# Altium PCB Audio_Amplifier PCB.PcbDoc
Units mm, origin at the board's own origin, x right, y up, seen from the top; angles counter-clockwise.
Board outline 83.5 x 52 mm, 2 copper layers (Top Layer, Bottom Layer); 42 components, 32 nets, 113 pads, 0 vias.
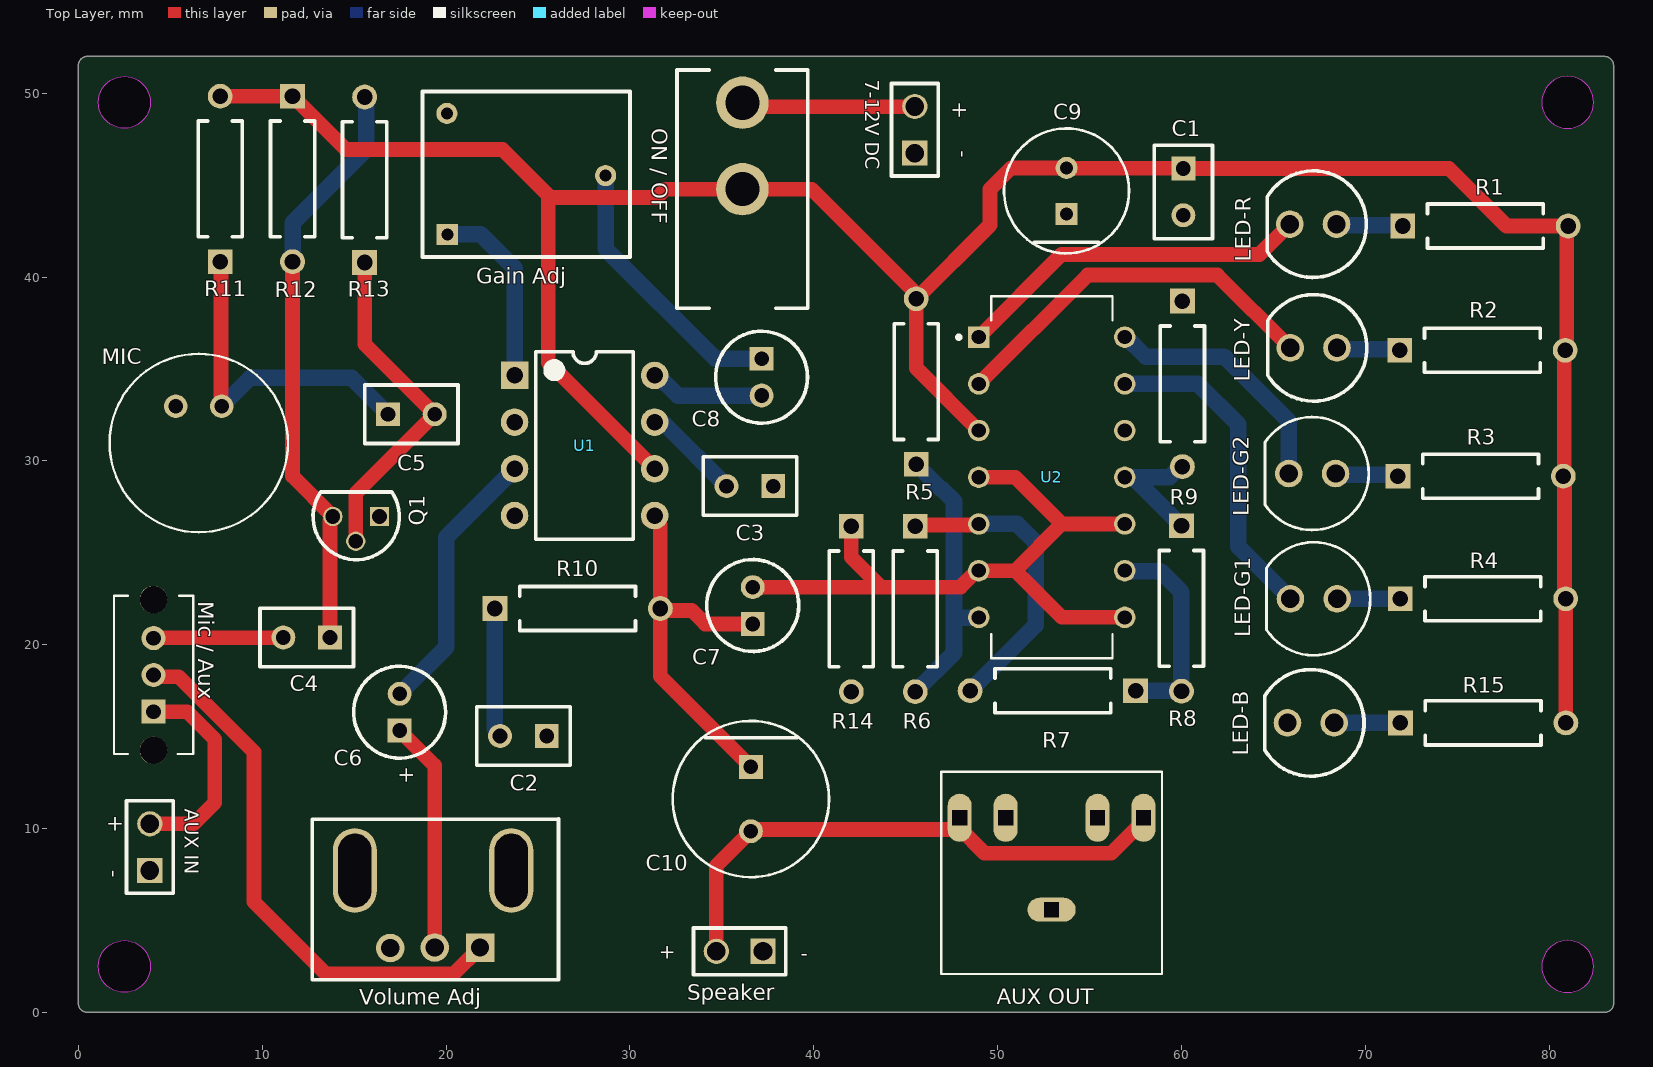
[diagram p0: Top Layer view]
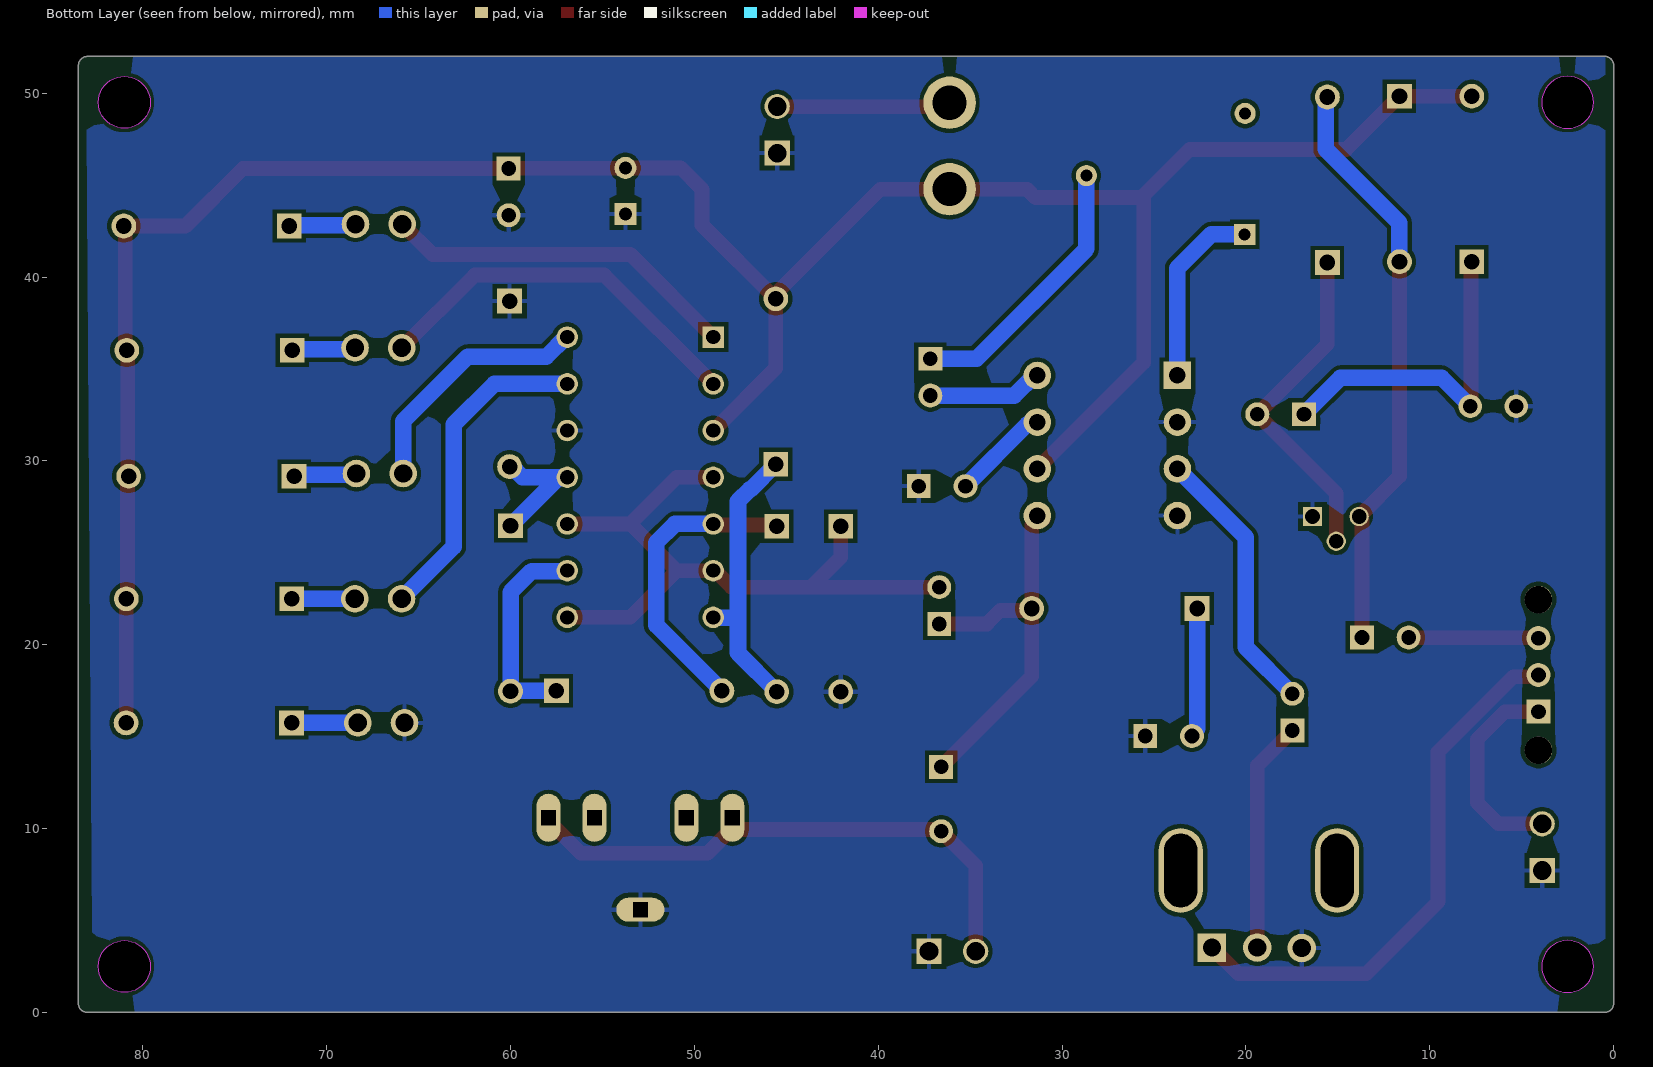
[diagram p1: Bottom Layer view, seen from below]

## Layer stack, top to bottom
Top Solder: solder mask 0.0102, Solder Resist, Dk 3.5
Top Layer: signal copper 0.0356
Dielectric 1: dielectric 0.32, FR-4, Dk 4.8
Bottom Layer: signal copper 0.0356
Bottom Solder: solder mask 0.0102, Solder Resist, Dk 3.5

## Board outline
0,0.5 0,51.5 cw(c0.5,51.5) 0.5,52 83,52 cw(c83,51.5) 83.5,51.5 83.5,0.5 cw(c83,0.5) 83,0 0.5,0 cw(c0.5,0.5)
cut-out: 2.5,1.086 cw(c2.5,2.5) 1.086,2.5 cw(c2.5,2.5) 2.5,3.914 cw(c2.5,2.5) 3.914,2.5 cw(c2.5,2.5)
cut-out: 79.586,49.5 ccw(c81,49.5) 81,48.086 ccw(c81,49.5) 82.414,49.5 ccw(c81,49.5) 81,50.914 ccw(c81,49.5)
cut-out: 79.586,2.5 ccw(c81,2.5) 81,1.086 ccw(c81,2.5) 82.414,2.5 ccw(c81,2.5) 81,3.914 ccw(c81,2.5)
cut-out: 2.5,48.086 cw(c2.5,49.5) 1.086,49.5 cw(c2.5,49.5) 2.5,50.914 cw(c2.5,49.5) 3.914,49.5 cw(c2.5,49.5)

## Design rules (kind name [scope] priority, off if disabled: settings)
Clearance [All] p1: gap=0.22 ignorepadtopadclearanceinfootprint=FALSE except(0.1: Text-Text; 0.254: Text-Hole)
HoleSize [All] p1: absolutevalues=TRUE maxlimit=5 minlimit=0.025 maxpercent=80.000 minpercent=20.000
MinimumSolderMaskSliver [All] p1: minsoldermaskwidth=0.12
PolygonConnect [All] p1: connectstyle=Relief reliefconductorwidth=0.254 reliefentries=4 polygonreliefangle="90 Angle" airgapwidth=0.254
RoutingVias [All] p1: holewidth=0.711 width=1.27 viastyle="Through Hole" minholewidth=0.711 minwidth=1.27 maxholewidth=0.711 maxwidth=1.27
SilkToSolderMaskClearance [IsPad] p1: minsilkscreentomaskgap=0.12 clearancetoexposedcopper=TRUE
SolderMaskExpansion [All] p1: expansion=0.05 istentingtop=FALSE
SupplyNets "Schematic Supply Nets" [InNet('GND')] p1: voltage=0.000
Width [All] p1: maxlimit=0.9 minlimit=0.8 preferedwidth=0.9 toplayer_maxwidth=0.8 toplayer_prefwidth=0.8 bottomlayer_minwidth=0.9 minimp=50.000000 maximp=50.000000 favimp=50.000000
27 further rules are at their usual default settings.

## Classes and differential pairs
component class Audio_Amplifier: "7-12V DC" "AUX IN" "AUX OUT" C1 C2 C3 C4 C6 C7 C8 C9 C10 LED-B LED-G1 LED-G2 LED-R LED-Y "Mic / Aux" Q1 R1 R2 R3 R4 R5 R6 R7 R8 R9 R10 R11 R13 R14 R15 Speaker

## Components (designator, comment, footprint, x,y, rotation, side; value= is the part's Value field where it differs from the comment)
"7-12V DC" "7-12V DC" SAMTEC_HTSW-101-08-T-D 45.491,48.006 r0 top (schematic designator J2)
"AUX IN" "Mic/Aux" SAMTEC_HTSW-101-08-T-D 3.886,8.992 r0 top (schematic designator J1)
"AUX OUT" "SJ1-3525NG" CUI_SJ1-3525NG 52.934,5.588 r90 top (schematic designator J4)
C1 "0.1uF" CAPR51-254-508X318X736 60.096,44.628 r270 top
C2 "0.1uF" CAPR51-254-508X318X736 24.206,15.037 r180 top
C3 "0.1uF" CAPR51-254-508X318X736 36.525,28.626 r180 top
C4 "0.1uF" CAPR51-254-508X318X736 12.421,20.396 r180 top
C5 "0.1uF" CAPR51-254-508X318X736 18.11,32.537 r0 top
C6 "1uF" CAPPR55-200-1100X500X1200 17.475,16.332 r90 top
C7 "1uF" CAPPR55-200-1100X500X1200 36.678,22.133 r90 top
C8 "10uF" CAPPR55-200-1100X500X1200 37.16,34.553 r270 top
C9 "100uF" FP-RAD-TH-D_6_3_0_5-L_11-MFG 53.746,44.684 r90 top
C10 "220uF" FP-EEU-FC1V221L-MFG 36.576,11.608 r270 top
"Gain Adj" "4.7k Trimmer" FP-3362U-MFG 24.689,44.704 r0 top
LED-B "LED-B" WL-TMRW_D5.8H11.7 67.031,15.748 r180 top
LED-G1 "151051VS04000" WL-TMRC_D5.9H8.7 67.192,22.498 r180 top
LED-G2 "151051VS04000" WL-TMRC_D5.9H8.7 67.107,29.312 r180 top
LED-R "151053RS03000" WL-TMRW_D5.8H11.7 67.158,42.875 r180 top
LED-Y "LED-Y" WL-TMRW_D5.8H11.7 67.183,36.144 r180 top
MIC "CMA-6542PF" CUI_CMA-6542PF 6.548,30.969 r270 top
"Mic / Aux" "Mic/Aux" SW_OS102011MS2QN1 4.089,18.358 r90 top (schematic designator S1)
"ON / OFF" "A101SYCB04" FP-A101SYCB04-MFG 36.119,44.78 r180 top (schematic designator SW2)
Q1 "2N3904" ONSC-TO-92-3-29-11 15.113,26.975 r180 top
R1 "MFR-25FBF52-10K" RESA60-630X240 76.53,42.774 r0 top value=470
R2 "MFR-25FBF52-10K" RESA60-630X240 76.366,36.012 r0 top value=470
R3 "MFR-25FBF52-10K" RESA60-630X240 76.265,29.166 r0 top value=470
R4 "MFR-25FBF52-10K" RESA60-630X240 76.392,22.498 r0 top value=470
R5 "MFR-25FBF52-10K" RESA60-630X240 45.568,34.315 r90 top value=80k
R6 "MFR-25FBF52-10K" RESA60-630X240 45.517,21.946 r270 top value=1.5k
R7 "MFR-25FBF52-10K" RESA60-630X240 53,17.5 r180 top value=1.5k
R8 "MFR-25FBF52-10K" RESA60-630X240 59.995,21.971 r270 top value=1.5k
R9 "MFR-25FBF52-10K" RESA60-630X240 60.046,34.188 r270 top value=1.5k
R10 "MFR-25FBF52-10K" RESA60-630X240 27.153,21.971 r0 top value=10K
R11 "MFR-25FBF52-10K" RESA60-630X240 7.712,45.332 r90 top value=47k
R12 "MFR-25FBF52-10K" RESA60-630X240 11.649,45.332 r270 top value=10k
R13 "MFR-25FBF52-10K" RESA60-630X240 15.57,45.288 r90 top value=100K
R14 "MFR-25FBF52-10K" RESA60-630X240 42.037,21.946 r270 top value=1M
R15 "MFR-25FBF52-10K" RESA60-630X240 76.403,15.748 r0 top value=680
R? "PTV09A-8025U-B103" FP-PTV09-8-MFG 19.406,-3.531 r0 top
Speaker "Speaker" SAMTEC_HTSW-101-08-T-D 35.966,3.327 r90 top (schematic designator J3)
U1 "LM386N-1" P0008A 27.534,30.836 r0 top
U2 "LM339N" DIP794W45P254L1969H508Q14 52.941,29.108 r0 top

## Footprints (in the part's own frame and the unit in brackets; to place one, negate y for a bottom-side part, rotate by r counter-clockwise, add the part's x,y. Pads: shape width x height; smd on the part's side, far side on the other; paste and mask are expansions set on the pad)
CAPPR55-200-1100X500X1200 [mm] "THD, 2-Leads, Dia 5mm, Body Length 11mm"
  rect 1.3x1.3 hole 0.8: 1(-1,0)
  round 1.3 hole 0.8: 2(1,0)
  silkscreen extent -2.5,-2.5 2.5,2.5, body extent -2.5,-2.5 2.5,2.5, height 12
CAPR51-254-508X318X736 [mm] "THD, 2-Leads, Body 5.08x3.18mm"
  rect 1.3x1.3 hole 0.8: 1(-1.27,0)
  round 1.3 hole 0.8: 2(1.27,0)
  silkscreen extent -2.54,-1.59 2.54,1.59, body extent -2.54,-1.59 2.54,1.59, height 7.36
CUI_CMA-6542PF [mm]
  round 1.278 hole 0.77: GND(-2,-1.25) OUT(-2,1.25)
  silkscreen extent -4.85,-4.85 4.85,4.85
CUI_SJ1-3525NG [mm]
  oval 1.308x2.616 hole 0.8 square: 1(0,0)
  oval 2.616x1.308 hole 0.8 square: 2(5,-5) 3(5,5) 4(5,-2.5) 5(5,2.5)
  silkscreen extent -3.5,-6 7.5,6
DIP794W45P254L1969H508Q14 [mm]
  rect 1.17x1.17 / inner round 1.17 / far side rect 1.17x1.17 hole 0.77: 1(-3.97,7.62)
  round 1.17 hole 0.77: 2(-3.97,5.08) 3(-3.97,2.54) 4(-3.97,0) 5(-3.97,-2.54) 6(-3.97,-5.08) 7(-3.97,-7.62) 8(3.97,-7.62) 9(3.97,-5.08) 10(3.97,-2.54) 11(3.97,0) 12(3.97,2.54) 13(3.97,5.08) 14(3.97,7.62)
  silkscreen extent -5.15,-9.84 3.3,9.84, body extent -4.25,-9.53 4.25,9.53, height 5.33
FP-3362U-MFG [mm]
  rect 1.15x1.15 hole 0.65 paste-2539.97 mask+0: 1(-4.623,-2.388)
  round 1.15 hole 0.65 paste-2539.97 mask+0: 2(3.988,0.813) 3(-4.648,4.191)
  silkscreen extent -5.97,-3.62 5.31,5.38
FP-A101SYCB04-MFG [mil]
  round 112.37 hole 73 paste-99999 mask+0: 2(0,0) 3(0,-185)
  silkscreen extent -140,-255 140,255, body extent -144,-259 144,259, height 10
FP-EEU-FC1V221L-MFG [mm]
  rect 1.3x1.3 hole 0.8 paste-2539.97 mask+0: 1(-1.75,0)
  round 1.3 hole 0.8 paste-2539.97 mask+0: 2(1.75,0)
  silkscreen extent -4.25,-4.25 4.25,4.25, body extent -4.35,-4.35 4.35,4.35, height 0.25
FP-PTV09-8-MFG [mm]
  rect 1.55x1.55 hole 1 paste-2539.97 mask+0: 1(2.438,7.061)
  round 1.55 hole 1 paste-2539.97 mask+0: 2(-2.438,7.036) 3(-0.025,7.061)
  rrect100% 2.4x4.6 hole 4 slot 1.8 at 0 deg paste-2539.97 mask+0: 4(-4.369,11.252) 5(4.14,11.252)
  silkscreen extent -6.68,5.31 6.71,14.05
FP-RAD-TH-D_6_3_0_5-L_11-MFG [mm]
  rect 1.2x1.2 hole 0.7 paste-2539.97 mask+0: 1(-1.25,0)
  round 1.2 hole 0.7 paste-2539.97 mask+0: 2(1.25,0)
  silkscreen extent -3.4,-3.4 3.4,3.4, body extent -3.5,-3.5 3.5,3.5, height 0.25
ONSC-TO-92-3-29-11 [mm] "TO, 3-Leads, Body Dia 4.7mm, Pitch 1.27mm"
  rect 1.05x1.05 hole 0.8: 1(-1.27,0)
  round 1.05 hole 0.8: 2(0.025,1.346) 3(1.27,0)
  silkscreen extent -2.35,-1.34 2.35,2.35, body extent -2.35,-1.33 2.36,2.36, height 7.87
P0008A [mm] "DIP, 8-Leads, Body 10.15x6.6mm, Pitch 2.54mm"
  rect 1.5x1.5 hole 0.9: 1(-3.81,3.81)
  round 1.5 hole 0.9: 2(-3.81,1.27) 3(-3.81,-1.27) 4(-3.81,-3.81) 5(3.81,-3.81) 6(3.81,-1.27) 7(3.81,1.27) 8(3.81,3.81)
  silkscreen extent -2.65,-5.1 2.65,5.1, body extent -3.95,-5.07 3.95,5.07, height 5.08
RESA60-630X240 [mm] "Axial Resistor, 2-Leads, Dia 2.4mm, Body Length 6.3mm"
  rect 1.35x1.35 hole 0.85: 1(-4.5,0)
  round 1.35 hole 0.85: 2(4.5,0)
  silkscreen extent -3.15,-1.2 3.15,1.2, body extent -4.77,-1.19 4.77,1.2, height 2.4
SAMTEC_HTSW-101-08-T-D [mm]
  rect 1.37x1.37 / inner round 1.37 / far side rect 1.37x1.37 hole 1.02: 01(0,-1.27)
  round 1.37 hole 1.02: 02(0,1.27)
  silkscreen extent -1.27,-2.51 1.27,2.51
SW_OS102011MS2QN1 [mm]
  rect 1.308x1.308 / inner round 1.308 / far side rect 1.308x1.308 hole 0.8: 1(-2,0)
  round 1.308 hole 0.8: 2(0,0) 3(2,0)
  round 1.5 hole 1.5 unplated: ""(-4.1,0) ""(4.1,0)
  silkscreen extent -4.3,-2.15 4.3,2.15, body extent -4.3,-2.15 4.3,2.15, height 4.4
WL-TMRC_D5.9H8.7 [mm] "THT Mono-color Round Color LED, 2-leads"
  round 1.5 hole 1: 1(-1.27,0) 2(1.27,0)
  silkscreen extent -3.07,-3.07 2.58,3.08, body extent -2.95,-2.95 2.45,2.95, height 9.2
WL-TMRW_D5.8H11.7 [mm] "THT Mono-color Round LED, 2-leads"
  round 1.5 hole 1: 1(1.27,0) 2(-1.27,0)
  silkscreen extent -2.9,-2.9 2.5,2.9, body extent -2.9,-2.9 2.5,2.9, height 11.7

## Part data
"7-12V DC" "AUX IN" Speaker: library part HTSW-101-08-T-D, Package=None, Availability=Unavailable, MP=HTSW-101-08-T-D, Price=None
"AUX OUT": library part CMP-002-00071-1, "3.5 mm Right-Angle Stereo Jack, 5 Pin PCB Mount, Isolated Ground", Case/Package=None, Availability=Unavailable, Design Item ID=SJ1-3525NG, MP=SJ1-3525NG, Price=None, Source=SJ1-3525NG.SchLib
C1 C2 C3 C4 C5: library part CMP-1664-00004-1, "Radial Leaded Multilayer Ceramic Capacitor, 0.1 uF, +/- 10%, 50 V, -55 to 125 degC, 2-Pin THD, RoHS, Tape and Reel", Case\Package=SOT-23-5, Dropout Voltage="260 mV", Max Input Voltage="8 V", Max Operating Temperature="85 degC", Max Power Dissipation="250 mW", Min Operating Temperature="-40 degC", Output Current="150 mA", Output Voltage="5 V", Package Quantity=3000, ComponentLink1Description="Manufacturer URL", ComponentLink1URL=http://www.kemet.com/, ComponentLink2Description=Datasheet, ComponentLink2URL=http://www.kemet.com/docfinder?Partnumber=C320C104K5R5TA, DatasheetVersion=Dec-15, Height="1.3 mm", Length="3 mm", Mount="Surface Mount", Outputs=1, PackageDescription="2-Pin Through Hole Device, Body 5.08 x 3.18 mm, Pitch 2.54 mm", PackageReference=CAPR51-254-508X318X736, Packaging="Tape and Reel", Pins=5, Radiation Hardening=No, RoHSCompliant=true, Width="1.8 mm"
C6 C7: library part CMP-1665-00039-1, "Aluminum Electrolytic Capacitor, 1 uF, +/- 20%, 50 V, -55 to 105 degC, 2-Pin THD, RoHS, Bulk", Max Operating Temperature="70 degC", Min Operating Temperature="-30 degC", Package Quantity=150, Channels=2, ComponentLink1Description="Manufacturer URL", ComponentLink1URL=http://www.panasonic.com/, ComponentLink2Description=Datasheet, ComponentLink2URL=https://datasheet.ciiva.com/7275/94060-7275472.pdf, DatasheetVersion=Mar-05, Mount="Through Hole", PackageDescription="2-Pin Radial Lead, Dia 5 mm, Body Length 11 mm", PackageReference=CAPPR55-200-1100X500X1200, Packaging=Bulk, Radiation Hardening=No, RoHSCompliant=true
C8: library part CMP-1665-00038-2, "Aluminum Electrolytic Capacitor, 10 uF, +/- 20%, 50 V, -40 to 85 degC, 2-Pin THD, RoHS, Bulk", Case/Package=Radial, Dielectric Material=Aluminium, Leakage Current=3uA, Manufacturer=Panasonic, Max Operating Temperature=85degC, Min Operating Temperature=-40degC, Package Description="2-Pin Radial Lead, Dia 5 mm, Height 12 mm", Package Quantity=200, Package Reference=CAPPR55-200-1100X500X1200, Ripple Current=65mA, Tolerance=20%, Voltage=50V, Capacitance=10uF, Datasheet URL=https://industrial.panasonic.com/cdbs/www-data/pdf/RDF0000/ABA0000C1218.pdf, Datasheet Version="Rev. 05, 10/2016", Diameter=5mm, Dissipation Factor=0.12%, Height=11mm, Height - Seated (Max)=0.472inch, Lead Diameter=0.5mm, Lead Free=LeadFree, Lead Pitch=2mm, Lead/Base Style=Straight, Length=11mm, Life (Hours)=2000Hour, Manufacturer URL=http://www.panasonic.com/, Mount=ThroughHole, Number of Pins=2, Packaging=Bulk, Radiation Hardening=No, REACH SVHC=NoSVHC, Ripple Current (AC)=65mA, RoHSCompliant=true, Termination=Radial, Voltage Rating=50V, Voltage Rating (DC)=50V
C9: library part CMP-05427-001480-1, "Aluminum Electrolytic Capacitors (Radial Lead Type) 100uF ±20% 25V"
C10: library part CMP-05427-000010-1, "CAP ALUM 220UF 20% 35V RADIAL", Leakage Current=77uA, Manufacturer="Panasonic Electronic Components", Manufacturer Part Number=EEU-FC1V221L, Package=0, Ripple Current=730mA, Temperature="-55°C to +105°C", Temperature Range High=+105°C, Temperature Range Low=-55°C, Tolerance=20%, Voltage Rating=35V, Automotive=Yes, Automotive Grade="Grade 2", Capacitance=220uF, Category=Cap, ComponentLink2Description=Datasheet, ComponentLink2URL=https://industrial.panasonic.com/cdbs/www-data/pdf/RDF0000/ABA0000C1209.pdf, Device Class L1="Passive Components", Device Class L2=Capacitors, Device Class L3="Aluminum Electrolytic Capacitors", Digikey Description="CAP ALUM 220UF 20% 35V RADIAL", Dissipation Factor=12%, Esr=0.085Ω, Height=16.5mm, Lead Free=Yes, Life=2000Hours, Material=Aluminum, Mouser Description="Capacitor; Aluminum Electrolytic; Fc Radial Elec Cap 220uF 35V", Octopart=https://octopart.com/eeu-fc1v221l-panasonic-39478519, RoHS=TRUE
"Gain Adj": library part CMP-07234-000033-1, "TRIMMER 200K OHM 0.5W PC PIN TOP", Color=Blue, Max Operating Temperature=125°C, Max Power Dissipation=500mW, Min Operating Temperature=-55°C, Package Quantity=50, Resistance=200kR, Resistor Type=Cermet, Temperature Coefficient=100ppm/°C, Tolerance=10%, Voltage Rating (DC)=300V, Contact Plating=Tin, Depth=6.99mm, Height=0.185inch, Lead Free="Lead Free", Length=6.6mm, Military Standard=Not, Mount="Through Hole", Packaging=Rail/Tube, Power Rating=500mW, RoHS Compliant=Yes, Series="Trimpot® 3362 - Sealed", Taper=Linear, Technology=CERMET, Termination=Pin, Weight=0.02oz, Width=0.26inch
LED-B: library part CMP-1489-00006-2, Case/Package=Radial, Color=Blue, Forward Current=100mA, Forward Voltage=2.7V, Max Operating Temperature=85°C, Max Reverse Voltage (DC)=5V, Min Operating Temperature=-40°C, Test Current=20mA, Dominant Wavelength=465nm, Height=8.6mm, Length=5mm, Lens Size=5mm, Lens Style="Circular, Clear, Round", Luminous Intensity=2cd, Mount="Through Hole", NexarPartId=29717816, Packaging=Bulk, Peak Wavelength=461nm, REACH SVHC=Unknown, RoHS=Compliant, Viewing Angle=45°, Wavelength=465nm, Width=5mm
LED-G1 LED-G2: library part CMP-1488-00007-2, Case/Package=Radial, Color=Green, Forward Current=100mA, Forward Voltage=2.1V, Max Operating Temperature=85°C, Max Reverse Voltage (DC)=5V, Min Operating Temperature=-40°C, Test Current=20mA, Dominant Wavelength=572nm, Height=8.6mm, Length=5mm, Lens Size=5mm, Lens Style="Circular, Diffused, Round", Luminous Intensity=140mcd, Mount="Through Hole", NexarPartId=29717814, Packaging=Bulk, Peak Wavelength=573nm, REACH SVHC=Unknown, RoHS=Compliant, Viewing Angle=40°, Wavelength=572nm, Width=5mm
LED-R: library part CMP-1489-00007-2, Case/Package=Radial, Color=Red, Forward Current=100mA, Forward Voltage=1.9V, Max Operating Temperature=85°C, Max Reverse Voltage (DC)=5V, Min Operating Temperature=-40°C, Test Current=20mA, Dominant Wavelength=623nm, Height=8.6mm, Length=5mm, Lens Size=5mm, Lens Style="Circular, Clear, Round", Luminous Intensity=5cd, Mount="Through Hole", NexarPartId=29717818, Packaging=Bulk, Peak Wavelength=631nm, REACH SVHC=Unknown, RoHS=Compliant, Viewing Angle=30°, Wavelength=623nm, Width=5mm
LED-Y: library part CMP-1477-00001-2, Case/Package=Radial, Color=Yellow, Forward Current=100mA, Forward Voltage=2.1V, Max Operating Temperature=85°C, Max Reverse Voltage (DC)=5V, Min Operating Temperature=-40°C, Test Current=20mA, Dominant Wavelength=590nm, Height=8.6mm, Length=5mm, Lens Size=5mm, Lens Style="Circular, Clear, Round", Luminous Intensity=1.5cd, Mount="Through Hole", NexarPartId=29717819, Packaging=Bulk, Peak Wavelength=592nm, REACH SVHC=Unknown, RoHS=Compliant, Viewing Angle=45°, Wavelength=590nm, Width=5mm
MIC: library part CMP-011-000000-1, "9.7 mm, Omnidirectional, PCB Mount, 4.5 Vdc, Electret Condenser Microphone", Package=None, Availability="In Stock", Check_prices=https://www.snapeda.com/parts/CMA-6542PF/CUI+Devices/view-part/?ref=eda, Component Type=Standard, CUI_purchase_URL=https://www.cuidevices.com/product/audio/microphones/electret-condenser-microphones/cma-6542pf?utm_source=snapeda.com&utm_medium=referral&utm_campaign=snapedaBOM, Design Item ID=CMA-6542PF, MF="CUI Devices", MP=CMA-6542PF, Pin Count=2, Price=None, Purchase-URL=https://pricing.snapeda.com/search/part/CMA-6542PF/?ref=eda, SnapEDA_Link=https://www.snapeda.com/parts/CMA-6542PF/CUI+Devices/view-part/?ref=snap, Source=CMA-6542PF.SchLib
"Mic / Aux": library part OS102011MS2QN1, "SLIDE SWITCH SPDT T/H ON-ON BBM", Package=None, Check_prices=https://www.snapeda.com/parts/OS102011MS2QN1/C%2526K/view-part/?ref=eda, Digi-Key_Part_Number=CKN9565-ND, MF=C&K, MP=OS102011MS2QN1, Purchase-URL=https://pricing.snapeda.com/search/part/OS102011MS2QN1/?ref=eda, SnapEDA_Link=https://www.snapeda.com/parts/OS102011MS2QN1/C%2526K/view-part/?ref=snap
"ON / OFF": library part CMP-03408-000017-1, "SWITCH TOGGLE SPDT 0.4VA 20V", Actuator Color=Chrome, Contact Current Rating=400mA, Contact Resistance=10mR, Flammability Rating="UL94 V-1", Insulation Resistance=30MR, Max Operating Temperature=85°C, Max Voltage Rating (AC)=20V, Min Operating Temperature=-30°C, Package Quantity=100, Power Rating=400mW, Actuator Length=10.41mm, Actuator Material=Phenolic, Actuator Type="Standard Round", Contact Material=Copper, Contact Plating=Gold, Depth=6.86mm, Electrical Life=6000Cycles, ELV=Compliant, Illumination Type=Non-Illuminated, Lead Free="Lead Free", Max Voltage Rating (DC)=20V, Mount=Panel, Number of Poles=1, Number of Positions=2, Orientation=Straight, Packaging=Bulk, Radiation Hardening=No, REACH SVHC="No SVHC", RoHS Compliant=Yes, Series="Gemini A", Switch Function=On-On, Termination="PC Pins", Throw Configuration=SPDT, Voltage Rating (AC)=20V, Voltage Rating (DC)=20V
Q1: library part CMP-2000-05562-1, "General Purpose Transistor, NPN Silicon, 200 mA, 60 V, -55 to 150 degC, 3-Pin TO-92, RoHS, Bulk", Collector- Base Voltage VCBO=60V, Collector- Emitter Voltage VCEO Max=40V, Collector-Emitter Saturation Voltage=0.3V, Emitter- Base Voltage VEBO=6V, Manufacturer=ONSemiconductor, Maximum DC Collector Current=0.2A, Maximum Operating Temperature=+150C, Maximum Power Dissipation=625mW, Minimum Operating Temperature=-65C, Package / Case=TO-92-3(TO-226), Package Description="3-Pin Transistor Outline, Body 4.825 x 3.685 mm, Pitch 1.27 mm", Package Reference=TO-92-3-29-11, Brand=ONSemiconductor, Configuration=Single, Datasheet URL=https://datasheet.ciiva.com/4725/2n3903-d-285841-4725808.pdf, Datasheet Version="Rev. 8, 08/2012", DC Collector/Base Gain hfe Min=60, Factory Pack Quantity=5000, Gain Bandwidth Product fT=270MHz, Manufacturer URL=http://www.onsemi.com/, Mounting Style=ThroughHole, Mounting Technology=ThroughHole, Packaging=Bulk, Product Category=BipolarTransistors-BJT, RoHS=Details, Transistor Polarity=NPN
R1 R2 R3 R4 R5 R6 R7 R8 R9 R10 R11 R12 R13 R14 R15: library part CMP-009-00047-4, "Axial Resistor, 10 KOhm, +/- 1%, 0.25 W, -55 to 155 degC, 2-Pin THD, RoHS, Bulk", Case/Package=Axial, Manufacturer=Yageo, Max Operating Temperature=155°C, Min Operating Temperature=-55°C, Package Description="2-Pin Axial Lead, Dia 2.4 mm, Body Length 6.3 mm", Package Quantity=200, Package Reference=MFR-25, Power=250mW, Tolerance=1%, Voltage Rating=250V, Datasheet URL=http://www.yageo.com/documents/recent/Yageo%20LR_MFR_2013.pdf, Datasheet Version=Apr-13, Manufacturer URL=http://www.yageo.com/, Mounting Technology=TH, Packaging=Bulk, RoHS Compliant=True
R?: library part CMP-07234-000054-1, "POT 10K OHM 1/20W CARBON LINEAR", Max Power Dissipation=50mW, Resistance=10kR, Resistor Type=Carbon, Tolerance=20%, Mount="Through Hole", Number of Gangs=1, Number of Turns=1, RoHS Compliant=Yes, Series="Pro Audio PTV09", Taper=Linear, Termination="PC Pins"
U1: library part CMP-0057-00052-4, "Low Voltage Audio Power Amplifier, 8-pin MDIP, Pb-Free", Manufacturer="Texas Instruments", PackageTopMarking=NSUZXYTTE#*LM*386N-1, PowerWise=N, Code_JEDEC=MS-001-BA, ComponentLink1Description="Datasheet URL", ComponentLink1URL=http://www.ti.com/general/docs/lit/getliterature.tsp?genericPartNumber=LM386&fileType=pdf, CompType="Audio IC", PackageDescription="MDIP, .365 x .250 x .130in, 8 Lead, .100in Pitch", PackageReference=P0008A, PinCount=8, RoHS=Y
U2: library part LM339N/NOPB, "Low Power Low Offset Voltage Quad Comparator", Package="PDIP-14 Texas Instruments", Availability="In Stock", Check_prices=https://www.snapeda.com/parts/LM339N/NOPB/Texas+Instruments/view-part/?ref=eda, MF="Texas Instruments", MP=LM339N/NOPB, Price=None, Purchase-URL=https://pricing.snapeda.com/search/part/LM339N/NOPB/?ref=eda, SnapEDA_Link=https://www.snapeda.com/parts/LM339N/NOPB/Texas+Instruments/view-part/?ref=snap

## Nets (pads, with @x,y where several pads share a name; then routed paths per layer and width w, separated by ;. In a path a pad name is that pad's centre, name@x,y a point inside that pad or via, vN(x,y) a via of type N, cw(c..) or ccw(c..) an arc to the next point about the centre after c; other vN are vias at no path point)
1IN+: R6.1 R7.2 U2.5 | length 16.6
  Top Layer w0.8: R6.1 45.578,26.507 48.91,26.507 U2.5
  Bottom Layer w0.9: R7.2 52.07,21.07 52.07,25.552 51.054,26.568 U2.5
2IN+: R5.1 R6.2 U2.7 | length 15.5
  Bottom Layer w0.9: R6.2 47.625,19.554 47.625,21.463 ; R5.1 46.934,28.449 46.989,28.449 47.625,27.813 47.625,21.463 ; U2.7 48.946,21.463 47.625,21.463
3IN+: R7.1 R8.2 U2.9 | length 11.5
  Bottom Layer w0.9: U2.9 56.931,24.009 58.846,24.009 59.995,22.86 R8.2 59.98,17.485 57.515,17.485 R7.1
4IN+: R8.1 R9.2 U2.11 | length 7.6
  Bottom Layer w0.9: R8.1 57.409,29.057 56.963,29.057 U2.11 59.344,29.108 59.924,29.688 R9.2
GND: "7-12V DC.01" "AUX IN.01" "AUX OUT.1" C1.2 C2.1 C3.1 C9.1 LED-B.1 MIC.GND Q1.1 R9.1 R14.2 R?.2 Speaker.01 U1.2 U1.4 U2.12
NetC2_2: C2.2 R10.1 | length 7.2
  Bottom Layer w0.9: R10.1 22.653,15.429 22.936,15.145 C2.2 C2.2@22.985,15.085 ; R10.1@22.756,21.77 R10.1@22.805,21.819
NetC3_2: C3.2 U1.7 | length 5.4
  Bottom Layer w0.9: U1.7 31.458,31.991 31.89,31.991 C3.2
NetC4_1: C4.1 Q1.3 R12.2 R13.2 | length 32.1
  Top Layer w0.8: R12.2 11.649,29.169 Q1.3 13.843,26.907 13.691,26.755 C4.1
  Bottom Layer w0.9: R12.2 11.649,42.942 15.646,46.939 15.646,49.712 R13.2
NetC4_2: "Mic / Aux.3" C4.2 | length 7.1
  Top Layer w0.8: 4.089,20.358 4.109,20.377 11.131,20.377 C4.2
NetC5_1: C5.1 MIC.OUT R11.1 | length 18.9
  Top Layer w0.8: R11.1 7.755,40.789 7.755,33.012 MIC.OUT MIC.OUT@7.798,33.099
  Bottom Layer w0.9: MIC.OUT@7.9,32.969 MIC.OUT 9.347,34.519 14.859,34.519 C5.1 C5.1@16.64,32.337
NetC5_2: C5.2 Q1.2 R13.1 | length 18.5
  Top Layer w0.8: Q1.2 15.088,28.245 C5.2 15.57,36.347 R13.1
NetC6_1: C6.1 R?.3 | length 12.6
  Top Layer w0.8: C6.1 19.38,13.427 R?.3
NetC6_2: C6.2 U1.3 | length 14.8
  Bottom Layer w0.9: C6.2 20.015,19.872 20.015,25.857 U1.3
NetC7_1: C7.1 C10.1 R10.2 U1.5 | length 21.4
  Top Layer w0.8: U1.5@31.039,26.811 U1.5@31.039,27 ; U1.5 31.344,26.836 31.653,26.527 R10.2 ; C10.1 31.653,18.281 R10.2 ; C7.1@36.652,21.107 C7.1 34.087,21.133 33.354,21.866 31.758,21.866 R10.2
NetC7_2: C7.2 R14.1 U2.4 U2.6 U2.8 U2.10 | length 38.2
  Top Layer w0.8: C7.2 43.663,23.133 ; R14.1 42.037,24.758 43.663,23.133 ; U2.4 50.952,29.108 53.492,26.568 ; U2.8 53.492,21.488 50.952,24.028 ; U2.10 53.492,26.568 ; 43.663,23.133 47.975,23.133 48.871,24.028 U2.6 50.952,24.028 ; 50.952,24.028 53.492,26.568
NetC8_1: "Gain Adj.2" C8.1 | length 14.9
  Bottom Layer w0.9: 28.677,45.517 28.677,41.529 34.652,35.553 C8.1
NetC8_2: C8.2 U1.8 | length 6.3
  Bottom Layer w0.9: U1.8 31.506,34.646 32.598,33.553 C8.2
NetC10_2: "AUX OUT.2" "AUX OUT.3" C10.2 Speaker.02 | length 31
  Top Layer w0.8: Speaker.02 34.696,7.978 C10.2 36.672,9.953 47.699,9.953 ; 47.934,10.588 47.934,10.008 49.282,8.66 56.171,8.66 57.959,10.448 57.959,11.096
"NetGain Adj_1": "Gain Adj.1" U1.1 | length 10.3
  Bottom Layer w0.9: 20.066,42.316 21.895,42.316 23.724,40.488 U1.1
NetJ1_02: "AUX IN.02" "Mic / Aux.1" | length 11.4
  Top Layer w0.8: 3.886,10.262 6.274,10.262 7.417,11.405 7.417,14.859 5.918,16.358 4.089,16.358
NetJ2_02: "7-12V DC.02" "ON / OFF.3" | length 9.4
  Top Layer w0.8: 36.144,49.251 36.157,49.263 45.479,49.263 45.491,49.276
NetLED-B_2: LED-B.2 R15.1 | length 3.6
  Bottom Layer w0.9: LED-B.2 R15.1
NetLED-G1_1: LED-G1.1 R4.1 | length 3.4
  Bottom Layer w0.9: LED-G1.1 R4.1
NetLED-G1_2: LED-G1.2 U2.13 | length 17.8
  Bottom Layer w0.9: U2.13 60.884,34.188 63.094,31.979 63.094,25.325 LED-G1.2
NetLED-G2_1: LED-G2.1 R3.1 | length 3.4
  Bottom Layer w0.9: LED-G2.1 68.449,29.239 71.692,29.239 R3.1
NetLED-G2_2: LED-G2.2 U2.14 | length 13.7
  Bottom Layer w0.9: U2.14 56.984,36.728 58.051,35.662 62.332,35.662 65.837,32.157 LED-G2.2
NetLED-R_1: LED-R.1 U2.1 | length 19.5
  Top Layer w0.8: U2.1 53.467,41.224 64.237,41.224 LED-R.1
NetLED-R_2: LED-R.2 R1.1 | length 3.6
  Bottom Layer w0.9: LED-R.2 68.478,42.824 71.979,42.824 R1.1
NetLED-Y_1: LED-Y.1 U2.2 | length 21
  Top Layer w0.8: U2.2 54.889,40.107 61.95,40.107 LED-Y.1
NetLED-Y_2: LED-Y.2 R2.1 | length 3.5
  Bottom Layer w0.9: LED-Y.2 68.519,36.078 71.8,36.078 R2.1
REF: "Mic / Aux.2" R?.1 | length 29.8
  Top Layer w0.8: 4.089,18.358 4.187,18.26 5.458,18.26 9.549,14.169 9.549,6.021 13.46,2.11 20.424,2.11 R?.1
VREF: "ON / OFF.2" C1.1 C9.2 R1.2 R2.2 R3.2 R4.2 R5.2 R11.2 R12.1 R15.2 U1.6 U2.3 | length 136.9
  Top Layer w0.8: R11.2 R12.1 14.542,46.939 23.063,46.939 25.554,44.449 ; U1.6 25.554,35.356 25.554,44.449 ; U2.3 45.568,35.052 R5.2 ; R15.2@80.866,15.957 R15.2@80.879,15.97 ; R15.2 80.897,15.754 80.897,22.492 R4.2 80.828,22.561 80.828,29.102 R3.2 80.815,29.217 80.815,35.961 R2.2 80.948,36.094 80.948,42.692 R1.2 77.673,42.774 74.549,45.898 C1.1 60.078,45.916 53.765,45.916 C9.2 50.735,45.934 49.581,44.78 49.581,42.829 R5.2 ; 25.554,44.449 25.681,44.322 31.447,44.322 31.905,44.78 36.119,44.78 39.878,44.78 45.462,39.196 45.462,38.921 R5.2
pads on no net: "AUX OUT.4" "AUX OUT.5" "Gain Adj.3" "Mic / Aux." R?.4 R?.5

## Polygon pours and split planes (outlines as drawn)
GND on Bottom Layer "GND_L02_P001" (solid, pour order 1): 83.083,51.994 0.457,51.994 0.457,0 0.483,0.025 82.702,0.025

## Silkscreen, mask and mechanical layers (free items; w line width, h text height)
Top Overlay:
  text "-" at 48.331,46.48 h0.8 r90
  text "+" at 1.522,9.889 h0.85
  text "-" at 2.205,7.338 h0.85 r90
  text "-" at 39.292,2.85 h0.8
  text "Volume Adj" at 15.288,0.408 h0.85

## Text inside footprints (layer, text, board x,y; h text height)
C6: Top Overlay "+" at 18.212,12.424 h0.85 r90
C8: Top Overlay "+" at 47.549,49.555 h0.85 r270
LED-R: Top Overlay "+" at 32.487,3.607 h0.8 r180